# Altium PCB led_frontend.PcbDoc
Units mil, origin at the board's own origin, x right, y up, seen from the top; angles counter-clockwise.
Board outline 3000 x 3000 mil, 2 copper layers (Top Layer, Bottom Layer); 27 components, 14 nets, 99 pads, 161 vias.
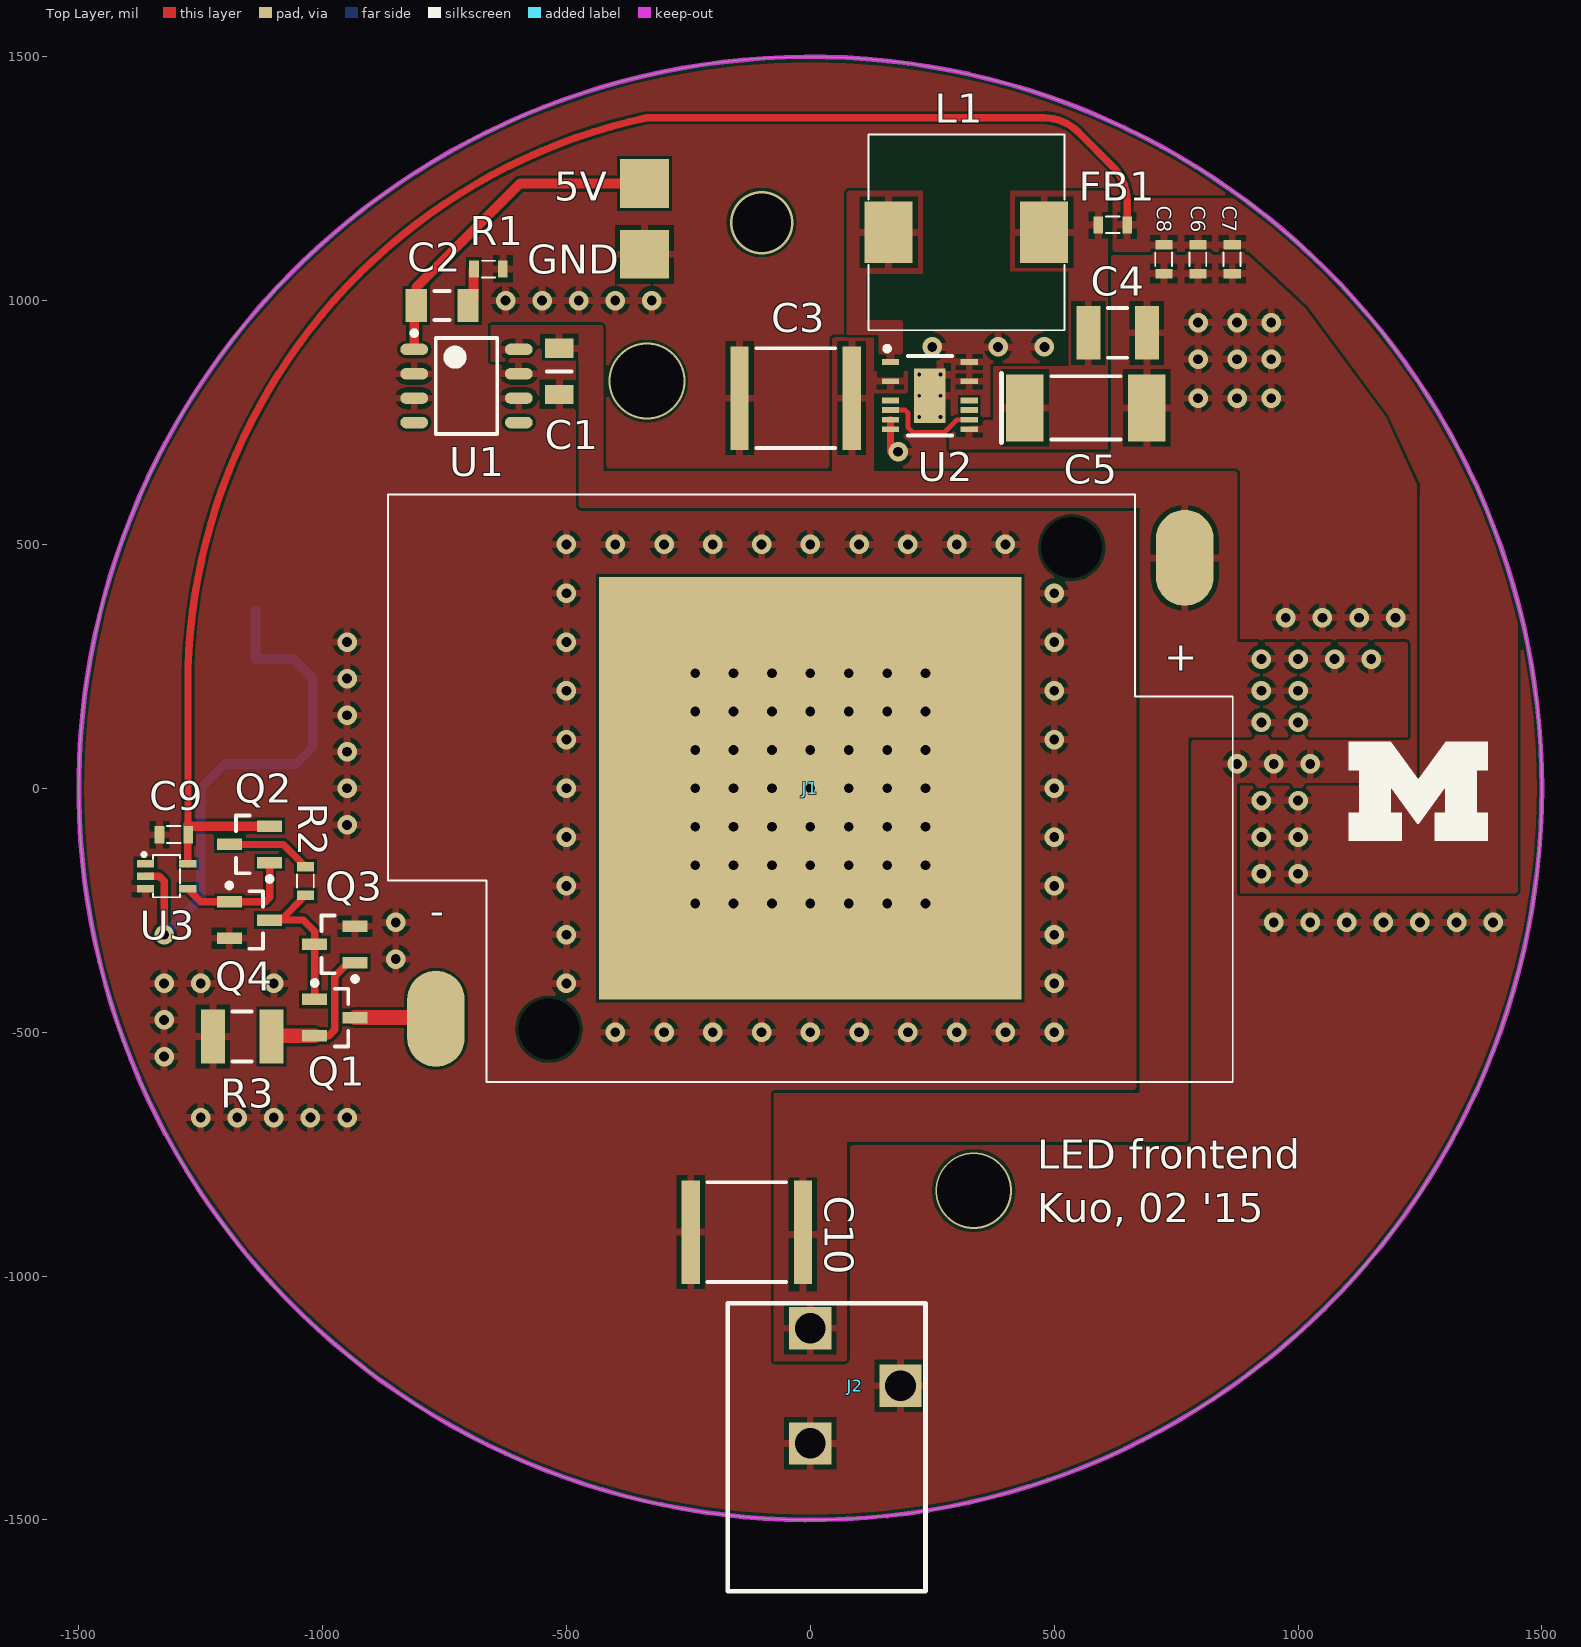
[diagram p0: Top Layer view]
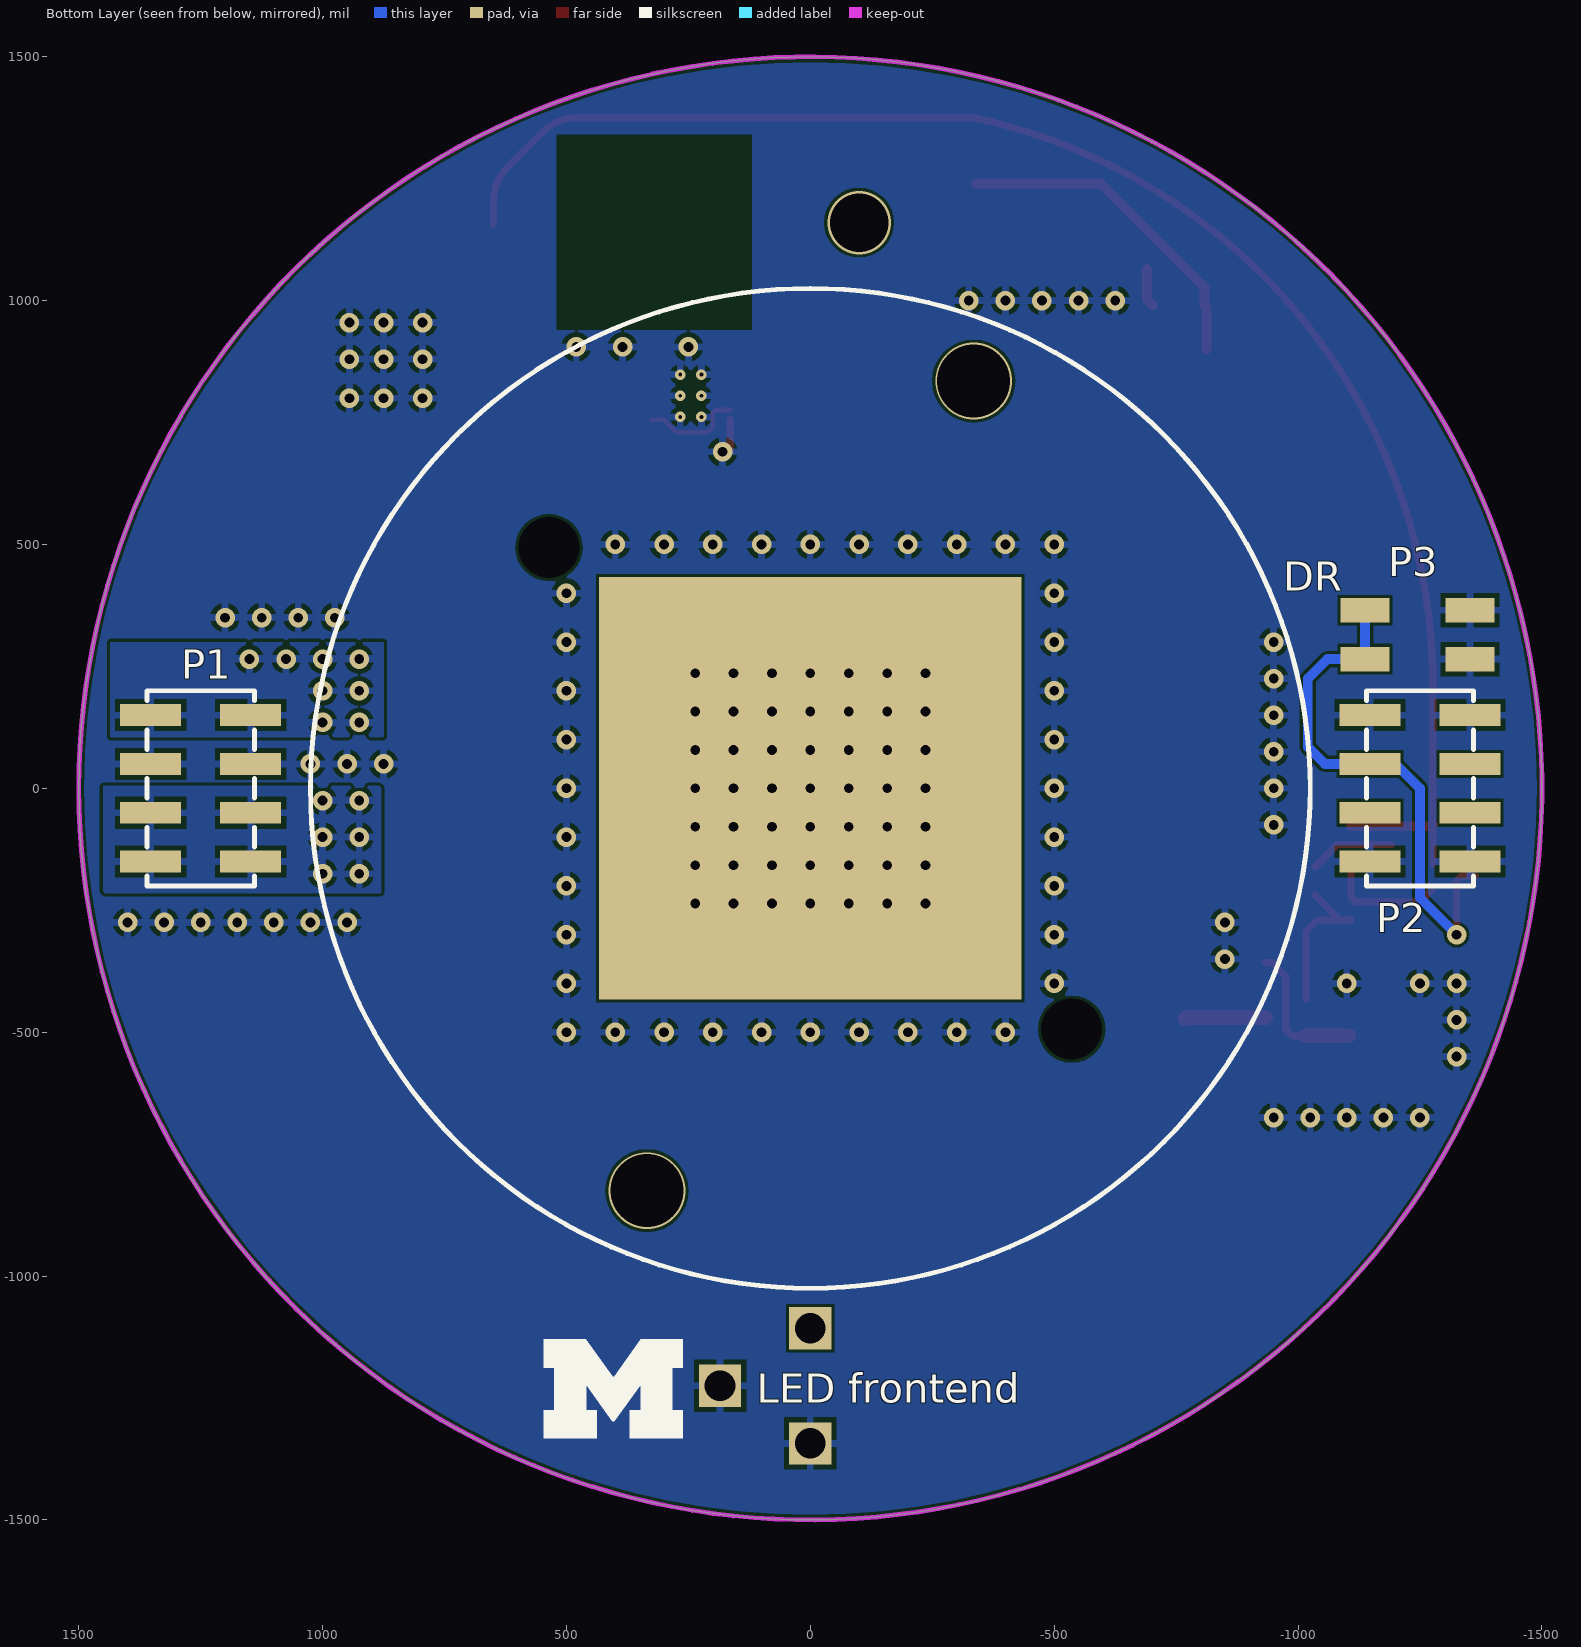
[diagram p1: Bottom Layer view, seen from below]

## Layer stack, top to bottom
Top Solder: solder mask 0.4, Solder Resist, Dk 3.5
Top Layer: signal copper 1.4
Dielectric 1: dielectric 12.6, FR-4, Dk 4.8
Bottom Layer: signal copper 1.4
Bottom Solder: solder mask 0.4, Solder Resist, Dk 3.5

## Board outline
-1500,0 ccw(c0,0) 0,-1500 ccw(c0,0) 1500,0 ccw(c0,0) 0,1500 ccw(c0,0)

## Design rules (kind name [scope] priority, off if disabled: settings)
Clearance "Clearance~Sunstone Circuits" [All] p1: gap=6 // Sunstone Circuits Minimum Clearance Rule (MLB~4&6 Layer Designs)
HoleSize "HoleSize~Sunstone Circuits" [All] p1: absolutevalues=TRUE maxlimit=251 minlimit=8 maxpercent=80.000 minpercent=20.000 // Sunstone Circuits Hole Size Rule (MLB~4&6 Layer Designs)
HoleSize Testpoint [All] p2: absolutevalues=TRUE maxlimit=100 minlimit=1 maxpercent=80.000 minpercent=20.000
HoleSize TestPointUsage [All] p3: absolutevalues=TRUE maxlimit=100 minlimit=1 maxpercent=80.000 minpercent=20.000
MinimumAnnularRing "MinimumAnnularRing~Sunstone Circuits" [All] p1: minimumring=7 // Sunstone Circuits Minimum Annular Ring (MLB~4&6 Layer Designs)
PlaneClearance "PlaneClearance~Sunstone Circuits" [All] p1: clearance=12 // Sunstone Circuits Power Plane Clearance Rule (MLB~4&6 Layer Designs)
PlaneConnect "PlaneConnect~Sunstone Circuits" [All] p1: planeconnectstyle=Relief reliefexpansion=10 reliefentries=4 reliefconductorwidth=20 reliefairgap=10 // Sunstone Circuits Power Plane Connect Rule (MLB~4&6 Layer Designs)
PolygonConnect "PolygonConnect~Sunstone Circuits" [All] p1: connectstyle=Relief reliefconductorwidth=15 reliefentries=4 polygonreliefangle="90 Angle" airgapwidth=10 // Sunstone Circuits Polygon Connect Style (MLB~4&6 Layer Designs)
RoomDefinition led_frontend [InComponentClass('led_frontend')] p1: confinementstyle=ConfineIn formatcopy=TRUE lockcomponents=FALSE outline -1427.96,-215 -1427.96,215 -1415.48,215 -1415.48,425 -878.11,425 -878.11,614.33 -861.65,614.33 -861.65,953.31 -845.71,953.31 -845.71,1039.37 -716.26,1039.37 -716.26,1099.61 98.34,1099.61 98.34,1352.76 541.66,1352.76 541.66,1189.61 676.26,1189.61 676.26,1141.26 899.61,1141.26 899.61,215 1427.96,215 1427.96,-215 878.11,-215 878.11,-614.33 251.22,-614.33 251.22,-1663.65 -184.29,-1663.65 -184.29,-1037.13 -284.68,-1037.13 -284.68,-614.33 -878.11,-614.33 -878.11,-584.94 -1270.47,-584.94 -1270.47,-239.21 -1396.93,-239.21 -1396.93,-215
RoutingVias "RoutingVias~Sunstone Circuits" [All] p1: holewidth=16 width=30 viastyle="Through Hole" minholewidth=8 minwidth=24 maxholewidth=20 maxwidth=40 // Sunstone Circuits Routing Vias Rule (MLB~4&6 Layer Designs)
ShortCircuit "ShortCircuit~Sunstone Circuits" [All] p1: allowed=FALSE // Sunstone Circuits Short Circuit Rule~Do Not Allow (MLB~4&6 Layer Designs)
SolderMaskExpansion Tentvias [isvia] p1: expansion=-20 // Sunstone Circuits Solder Mask Expansion Rule (MLB~4&6 Layer Designs)
SolderMaskExpansion "SolderMaskExpansion~Sunstone Circuits" [All] p2: expansion=3 // Sunstone Circuits Solder Mask Expansion Rule (MLB~4&6 Layer Designs)
ViasUnderSMD "ViasUnderSMD~Sunstone Circuits" [All] p1: allowed=FALSE // Sunstone Circuits Vias Under SMD~Do Not Allow (MLB~4&6 Layer Designs)
Width "Width~Sunstone Circuits" [All] p1: maxlimit=100 minlimit=6 preferedwidth=10 // Sunstone Circuits Minimum Width Rule (MLB~4&6 Layer Designs)
26 further rules are at their usual default settings.

## Components (designator, comment, footprint, x,y, rotation, side; value= is the part's Value field where it differs from the comment)
C1 "Ceramic capacitor" 0805 -515,855 r270 top
C2 "Ceramic capacitor" 1206 -755,990 r0 top
C3 "Ceramic capacitor" 2220 -30,800 r180 top
C4 "Ceramic capacitor" 1210 630,930 r180 top
C5 "Ceramic capacitor" 2917 565,780 r0 top
C6 "Ceramic capacitor" 0603 795,1085 r270 top
C7 "Ceramic capacitor" 0603 865,1085 r270 top
C8 "Ceramic capacitor" 0603 725,1085 r270 top
C9 "Ceramic capacitor" 0603 -1305,-95 r180 top
C10 "Ceramic capacitor" 2220 -130,-910 r180 top
FB1 "Ferrite Bead" 0603 620,1155 r180 top
J1 "1807200002" molex 0,0 r180 top locked
J2 "PJ-102AH" PJ-102AH 0,-1225 r180 top
L1 "L_22uH_SLF10145" SLF10145 320,1140 r180 top
P1 "HW-04-20-F-D-900-SM" HW-04-20-F-D-900-SM 1250,0 r270 bottom
P2 "HW-04-20-F-D-900-SM" HW-04-20-F-D-900-SM -1250,0 r270 bottom
P3 "2 x 2 header SMD" "2x2 header SMD" -1245,315 r270 bottom
Q1 "Si2308BDS" SOT23-3 -975,-470 r0 top
Q2 "Si2309CDS" SOT23-3 -1150,-115 r180 top
Q3 "Si2308BDS" SOT23-3 -975,-320 r180 top
Q4 "Si2308BDS" SOT23-3 -1150,-270 r0 top
R1 "Chip resistor" 0603 -660,1065 r0 top
R2 "Chip resistor" 0603 -1035,-190 r270 top
R3 "Chip resistor" 1210 -1165,-505 r0 top
U1 "LM2936HV" SOIC-8 -705,825 r0 top
U2 "LTC3630" MSE16(12) 245,805 r0 top
U3 "SN74AUP1T14" "SC-70-5 (DCK)" -1320,-180 r270 top

## Footprints (in the part's own frame and the unit in brackets; to place one, negate y for a bottom-side part, rotate by r counter-clockwise, add the part's x,y. Pads: shape width x height; smd on the part's side, far side on the other; paste and mask are expansions set on the pad)
"2x2 header SMD" [mm] "100 mils header, SMD"
  rect 1.27x2.54 smd: 1(-1.27,-2.73) 2(-1.27,2.73) 3(1.27,-2.73) 4(1.27,2.73)
  body extent -2.54,-3.43 2.54,3.43, height 9.7
0603 [mm] "2-Leads, Body 1.55x0.85mm, IPC Medium Density"
  rect 0.5x0.9 smd: 1(-0.75,0) 2(0.75,0)
  silkscreen extent -0.35,-0.45 0.35,0.43, body extent -0.75,-0.42 0.75,0.43, height 0.5
0805 [mm] "Chip Resistor, Body 2.0x1.2mm, IPC Low Density"
  rect 1x1.5 smd: 1(-1.2,0) 2(1.2,0)
  silkscreen extent 0,-0.65 0,0.65, body extent -1.07,-0.7 1.07,0.7, height 0.7
1206 [mm]
  rect 1.1x1.7 smd: 1(-1.35,0) 2(1.35,0)
  silkscreen extent -0.4,-0.75 0.4,0.75, body extent -1.7,-0.9 1.7,0.9, height 1.3
1210 [mm]
  rect 1.25x2.8 smd: 1(1.525,-0.102) 2(-1.525,-0.102)
  silkscreen extent -0.5,-1.4 0.5,1.2, body extent -1.8,-1.5 1.8,1.3, height 2.8
2220 [mm] "Chip Capacitor, 2-Leads, Body 5.70x5.00mm, IPC Medium Density"
  rect 0.95x5.4 smd: 1(-2.925,0) 2(2.925,0)
  silkscreen extent -2.05,-2.6 2.05,2.6, body extent -3.05,-2.7 3.05,2.7, height 2.5
2917 [mm] "Chip Capacitor, 2-Leads, Body 7.30x3.20mm, IPC Medium Density"
  rect 1.95x3.5 smd: 1(-3.175,0) 2(3.175,0)
  silkscreen extent -4.4,-1.8 1.8,1.8, body extent -3.8,-1.75 3.8,1.75, height 3.1
HW-04-20-F-D-900-SM [mm] "Samtec 100 mil 2x4 header"
  rect 1.14x3.175 smd: 1(-3.81,-2.602) 2(-3.81,2.603) 3(-1.27,-2.602) 4(-1.27,2.603) 5(1.27,-2.602) 6(1.27,2.603) 7(3.81,-2.602) 8(3.81,2.603)
  silkscreen extent -5.08,-2.79 5.08,2.79, body extent -5.08,-2.79 5.08,2.79, height 23
molex [mm] "CREE LED holder"
  oval 1.7x2.8 hole 3.175: 0(-13.61,-12.54) 0(13.61,12.54)
  rect 22x22 smd: 3(0,0)
  rect 22x22 smd far side: 3(0,0)
  oval 3x5 smd: +(-19.5,-12) -(19.5,12)
  silkscreen extent -22,-15.3 22,15.3, body extent -22,-15.3 22,15.3, height 4.5
MSE16(12) [mm] "TSSOP, 16-Leads, Body 4.04x3.00mm, Pitch 0.50mm, Thermal Pad 2.95x1.75mm, IPC Medium Density"
  rect 0.9x0.3 smd: 1(-2.05,1.75) 3(-2.05,0.75) 5(-2.05,-0.25) 6(-2.05,-0.75) 7(-2.05,-1.25) 8(-2.05,-1.75) 9(2.05,-1.75) 10(2.05,-1.25) 11(2.05,-0.75) 12(2.05,-0.25) 14(2.05,0.75) 16(2.05,1.75)
  rect 1.65x2.85 smd: 17(0,0)
  silkscreen extent -2.35,-2.08 1.15,2.57, body extent -1.55,-2.05 1.55,2.05, height 1.1
PJ-102AH [mm] "Power Jack"
  rect 2.2x2.2 hole 1.6: 1(0,-3) 2(0,3) 3(-4.7,0)
  silkscreen extent -6,-4.3 4.3,10.7, body extent -5.75,-3.99 4.08,10.89, height 10
"SC-70-5 (DCK)" [mm]
  rect 0.4x0.9 smd mask+0.05: 1(-0.65,-1.1) 2(0,-1.1) 3(0.65,-1.1) 4(0.65,1.1) 5(-0.65,1.1)
  silkscreen extent -1.18,-1.23 1.1,0.7, body extent -1.1,-0.7 1.1,0.7, height 1.1
SLF10145 [mm] "TDK chip inductors"
  rect 2.5x3.2 smd: 1(-4.05,0) 2(4.05,0)
  silkscreen extent -5.1,-5.1 5.1,5.1, body extent -5.1,-5.1 5.1,5.1, height 4.5
SOIC-8 [mm] "SOIC, 8-Leads, Body 4.90x3.90mm, Pitch 1.27mm, IPC Medium Density"
  oval 1.45x0.6 smd: 1(-2.725,1.905) 2(-2.725,0.635) 3(-2.725,-0.635) 4(-2.725,-1.905) 5(2.725,-1.905) 6(2.725,-0.635) 7(2.725,0.635) 8(2.725,1.905)
  silkscreen extent -2.85,-2.5 1.6,2.88, body extent -2,-2.5 2,2.5, height 1.75
SOT23-3 [mm] "SOT23, 3-Leads, Body 2.9x1.3mm, Pitch 0.95mm, Lead Span 2.3mm, IPC Medium Density"
  rect 1.3x0.6 smd: 1(-1.05,0.95) 2(-1.05,-0.95) 3(1.05,0)
  silkscreen extent -1.17,-1.5 0.7,1.92, body extent -0.7,-1.5 0.7,1.5, height 1.2

## Part data
C1: library part C_1u_100V_0805_ceramic, "Ceramic capacitor, 1 uF, 100 V, 0805 package"
C2: library part C_22u_16V_1206_ceramic, "Ceramic capacitor, 22 uF, 1206 package"
C3 C10: library part C_4.7u_2220_ceramic, "Ceramic capacitor, 4.7u, 2220 package"
C4: library part C_100u_1210_ceramic, "Ceramic capacitor, 100u, 1210 package"
C5: library part C_100u_2917_tantalum, "Tantalum capacitor, 100u, 2917 package"
C6 C9: library part C_0.1u_25V_0603_ceramic, "Ceramic capacitor, 0.1 uF, 0603 package"
C7: library part C_1u_16V_0603_ceramic, "Ceramic capacitor, 1 uF, 16 V, 0603 package"
C8: library part C_10u_16V_0603_ceramic, "Ceramic capacitor, 10 uF, 16 V, 0603 package"
FB1: library part FB_500mA_0603, "Ferrite Bead, 500 mA, 0603 package"
J1: library part "Molex LED holder", "LED Array Holders  for CREE* XLamp?   Arrays"
J2: "CONN PWR JACK 2.1X5.5MM HIGH CUR"
L1: "Inductor, 22 uH, TDK SLF10145"
P1 P2: "Samtec 2x4 100 mil connector"
P3: "2x2 100 mil header SMD"
Q1 Q3 Q4: "N-Channel 60-V (D-S) MOSFET"
Q2: "P-Channel 60-V (D-S) MOSFET"
R1: library part R_1_0603, "Chip resistor, 1,  0603 package"
R2: library part R_47_0603, "Chip resistor, 47, 0603 package"
R3: library part R_1.5_1210, "Chip resistor, 1.5, 1210 package"
U1: "Ultra-Low Quiescent Current LDO Voltage Regulator"
U2: "High Efficiency, 65V 500mA synchronous Step-Down Converter"
U3: "LOW POWER, 1.8/2.5/3.3-V INPUT, 3.3-V CMOS OUTPUT, SINGLE  SCHMITT-TRIGGER INVERTER GATE"

## Free pads (board coordinates)
  rect 100x100 smd: ""(-340,1095) ""(-340,1240)

## Via types
v1: diameter 40, hole 20, Top Layer to Bottom Layer, 152 vias
v2: diameter 21.65, hole 7.87, Top Layer to Bottom Layer, 6 vias
v3: diameter 157.48, hole 149.61, Top Layer to Bottom Layer, 2 vias
v4: diameter 130, hole 120, Top Layer to Bottom Layer, 1 vias

## Nets (pads, with @x,y where several pads share a name; then routed paths per layer and width w, separated by ;. In a path a pad name is that pad's centre, name@x,y a point inside that pad or via, vN(x,y) a via of type N, cw(c..) or ccw(c..) an arc to the next point about the centre after c; other vN are vias at no path point)
GND: C1.2 C3.2 C4.2 C5.2 C6.2 C7.2 C8.2 C9.2 C10.2 J2.2 J2.3 P1.3 P1.4 P2.1 P2.2 P2.7 P2.8 P3.2 P3.4 pad.@-340,1095 Q3.2 Q4.2 R1.2 R3.2 U1.2 U1.3 U1.6 U1.7 U2.7 U2.8 U2.14 U2.16 U2.17 U3.3 | length 81.5
  Top Layer w15: U2.7 U2.8 164.29,690 v1(180,690)
  other v1: -1250,-675 -1175,-675 -1100,-675 -1025,-675 -950,-675 -1325,-550 -400,-500 -300,-500 -200,-500 -100,-500 0,-500 100,-500 200,-500 300,-500 400,-500 500,-500 -1325,-475 -1325,-400 -1250,-400 -1100,-400 -500,-400 500,-400 -850,-350 -500,-300 500,-300 -850,-275 950,-275 1025,-275 1100,-275 1175,-275 1250,-275 1325,-275 1400,-275 -500,-200 500,-200 -500,-100 500,-100 -950,-75 -950,0 -500,0 500,0 875,50 950,50 1025,50 -950,75 -500,100 500,100 -950,150 -500,200 500,200 -950,225 -950,300 -500,300 500,300 975,350 1050,350 1125,350 1200,350 -500,400 500,400 -500,500 -400,500 -300,500 -200,500 -100,500 0,500 100,500 200,500 300,500 400,500 795,800 875,800 945,800 795,880 875,880 945,880 250,905 385,905 480,905 795,955 875,955 945,955 -625,1000 -550,1000 -475,1000 -400,1000 -325,1000
  other v2: 223.35,761.69 266.65,761.69 223.35,805 266.65,805 223.35,848.31 266.65,848.31
LED_DRIVE: P2.3 P3.1 P3.3 U3.2 | length 1122.8
  Top Layer w15: U3.2 -1335,-180 -1325,-190 v1(-1325,-300)
  Bottom Layer w20: v1(-1325,-300) -1250,-225 -1250,0 -1200,50 P2.3 -1055,50 -1020,85 -1020,225 -1060,265 P3.3 P3.1
NetC2_2: C2.2 R1.1 | length 79.7
  Top Layer w20: C2.2 -690.47,1001.38 R1.1@-690.47,1065
NetJ1_-: J1.- Q1.3 | length 167
  Top Layer w30: Q1.3 -770.16,-470 J1.-
NetL1_2: L1.2 U2.1
NetQ1_1: Q1.1 Q3.3 Q4.3 R2.2 | length 312.4
  Top Layer w15: Q4.3 Q4.3@-1085.47,-270 ; R2.2 Q4.3@-1085.47,-270 ; Q1.1 Q3.3 -1016.34,-293.66 -1040,-270 Q4.3@-1085.47,-270
NetQ1_2: Q1.2 Q3.1 R3.1 | length 296.3
  Top Layer w15: Q1.2 -987.4,-507.4 -975,-495 -975,-385 -947.4,-357.4 Q3.1
  Top Layer w30: R3.1@-1103.36,-507.4 Q1.2
NetQ2_1: Q2.1 Q4.1 U3.4 | length 254.2
  Top Layer w15: U3.4 -1249.69,-232.6 Q4.1 -1117.6,-232.6 -1108.66,-223.66 Q2.1
NetQ2_3: Q2.3 R2.1 | length 175.2
  Top Layer w15: Q2.3 -1080.47,-115 R2.1
NetU2_6: U2.6 U2.10 | length 208.5
  Top Layer w10: U2.6 194.53,775.47 200,770 200,740 210,730 275,730 300.79,755.79 U2.10
VCC3.3: C4.1 C5.1 FB1.2 L1.1 U2.9
VCC3.3_MAIN: C6.1 C7.1 C8.1 C9.1 FB1.1 P1.5 P1.6 P1.7 P1.8 Q2.2 U3.5 | length 3319.2
  Top Layer w15: U3.5 -1276.69,-75 ; -1275.88,249.26 ccw(c-85,210) -1276.02,244.75 ; C9.1 -1276.02,-95 -1276.02,-75.68 -1276.02,244.75 ; -355.3,1370.46 cw(c-85,210) -335.01,1375 ; FB1.1 649.53,1204.05 ccw(c549.53,1204.05) 620.24,1274.76 549.29,1345.71 ccw(c478.58,1275) 478.58,1375 -335.01,1375 ; -1276.02,244.75 cw(c-85,210) -335.01,1375
  Top Layer w20: -1276.69,-75 -1276.02,-75.68 -1274.09,-77.6 Q2.2
  other v1: 925,-175 1000,-175 925,-100 1000,-100 925,-25 1000,-25
VCC5: C2.1 pad.@-340,1240 U1.1 | length 685
  Top Layer w20: U1.1 -812.28,985.87 C2.1 -808.15,1026.85 -595,1240 pad.@-340,1240
VIN: C1.1 C3.1 C10.1 J1.+ J2.1 P1.1 P1.2 U1.8 U2.3
  other v1: 925,135 1000,135 925,200 1000,200 925,265 1000,265 1075,265 1150,265
pads on no net: J1.0 J1.3 P2.4 P2.5 P2.6 U1.4 U1.5 U2.5 U2.11 U2.12 U3.1
copper on no net:
  other v1: -236.22,-236.22 -157.48,-236.22 -78.74,-236.22 0,-236.22 78.74,-236.22 157.48,-236.22 236.22,-236.22 -236.22,-157.48 -157.48,-157.48 -78.74,-157.48 0,-157.48 78.74,-157.48 157.48,-157.48 236.22,-157.48 -236.22,-78.74 -157.48,-78.74 -78.74,-78.74 0,-78.74 78.74,-78.74 157.48,-78.74 236.22,-78.74 -236.22,0 -157.48,0 -78.74,0 0,0 78.74,0 157.48,0 236.22,0 -236.22,78.74 -157.48,78.74 -78.74,78.74 0,78.74 78.74,78.74 157.48,78.74 236.22,78.74 -236.22,157.48 -157.48,157.48 -78.74,157.48 0,157.48 78.74,157.48 157.48,157.48 236.22,157.48 -236.22,236.22 -157.48,236.22 -78.74,236.22 0,236.22 78.74,236.22 157.48,236.22 236.22,236.22
  other v3: 335,-825 -335,835
  other v4: -100,1160

## Polygon pours and split planes (outlines as drawn)
VIN on Top Layer "Top Layer-No Net" (solid, pour order 10): 775,-725 75,-725 75,-1175 -75,-1175 -75,-625 675,-625 675,575 -475,575 -475,875 -655,875 -655,950 -425,950 -425,650 45,650 45,925 130,925 130,855 200,855 200,810 130,810 130,650 875,650.01 875,300 1225,300 1225,105 775,105
VCC3.3 on Top Layer "Top Layer-No Net" (solid, pour order 8): 410,1225 410,1060 530,1060 530,865 375,865 375,755 285,755 285,695 500,695 610,695 610,825 610,1225
NetL1_2 on Top Layer "Top Layer-No Net" (solid, pour order 9): 230,1225 75,1225 75,930 140,930 140,860 140,855 190,855 190,960 115,960 115,1055 230,1055
VCC3.3_MAIN on Top Layer "Top Layer-No Net" (solid, pour order 11): 620,1210 620,1100 725,1100 825,1100 900,1100 1019.96,988.67 1185.06,765 1250.19,623.52 1250,580 1250,525 1250,435 1250,375 1250,5 881.31,5 881.31,-215 1450,-215 1450,250 1450,359.73 1430.38,458.38 1334.33,690.26 1265.62,809.84 1140.2,974.68 1078.03,1046.75 910.21,1198.85 881.31,1210
GND on Top Layer "Top Layer-No Net" (solid, pour order 14): -1500,0 ccw(c0,0) 0,-1500 ccw(c0,0) 1500,0 ccw(c0,0) 0,1500 ccw(c0,0)
VIN on Bottom Layer "Top Layer-No Net" (solid, pour order 18): 875,300 875,105 1435,105 1435,300
VCC3.3_MAIN on Bottom Layer "Top Layer-No Net" (solid, pour order 12): 880,5 1450,5 1450,-215 880,-215
GND on Bottom Layer "Top Layer-No Net" (solid, pour order 13): -1500,0 ccw(c0,0) 0,-1500 ccw(c0,0) 1500,0 ccw(c0,0) 0,1500 ccw(c0,0)

## Keep-outs
Keep-Out Layer:
  circle w10: c0,0 r1500

## Other copper
Top Layer:
  pour cut-out: 120,1340 520,1340 520,1227.5 407.5,1227.5 407.5,1052.5 520,1052.5 520,940 120,940 120,1050.41 232.5,1050.41 232.5,1227.5 120,1227.5
Bottom Layer:
  pour cut-out: 120,1340 520,1340 520,1227.5 520,1052.5 520,940 120,940 120,1050.41 120,1227.5

## Silkscreen, mask and mechanical layers (free items; w line width, h text height)
Top Overlay:
  region: 1104.07,-107.5 1212.36,-107.5 1212.36,-49.68 1190.34,-49.68 1190.34,2.63 1244.03,-72.63 1247.7,-72.63 1302.3,2.63 1302.3,-49.68 1280.28,-49.68 1280.28,-107.5 1388.57,-107.5 1388.57,-49.68 1366.55,-49.68 1366.55,37.5 1388.57,37.5 1388.57,95.32 1302.76,95.32 1247.7,19.15 1244.94,19.15 1189.88,95.32 1104.07,95.32 1104.07,37.5 1125.17,37.5 1125.17,-49.68 1104.07,-49.68
  text "5V" at -525,1205 h60
  text "GND" at -580,1055 h60
  text "LED frontend" at 465,-780 h60
  text "Kuo, 02 '15" at 465,-890 h60
Bottom Overlay:
  circle w10: c0,0 r1025
  region: 546.11,-1332.82 437.81,-1332.82 437.81,-1275 459.84,-1275 459.84,-1222.69 406.15,-1297.94 402.48,-1297.94 347.87,-1222.69 347.87,-1275 369.9,-1275 369.9,-1332.82 261.6,-1332.82 261.6,-1275 283.63,-1275 283.63,-1187.81 261.6,-1187.81 261.6,-1129.99 347.41,-1129.99 402.48,-1206.17 405.23,-1206.17 460.3,-1129.99 546.11,-1129.99 546.11,-1187.81 525,-1187.81 525,-1275 546.11,-1275
  text "DR" at -970,405 h60
  text "LED frontend" at 110,-1260 h60

## Text inside footprints (layer, text, board x,y; h text height)
J1: Top Overlay "-" at -750.98,-235.24 h60 r180; Top Overlay "+" at 794.29,292.32 h60 r180